# Altium PCB SmartHaloDD.PcbDoc (part 2 of 2)
Units mil, origin at the board's own origin, x right, y up, seen from the top; angles counter-clockwise.
Board outline 2460.63 x 2460.63 mil, 2 copper layers (Top Layer, Bottom Layer), stack 62.8 mil thick; 142 components, 107 nets, 460 pads, 151 vias.
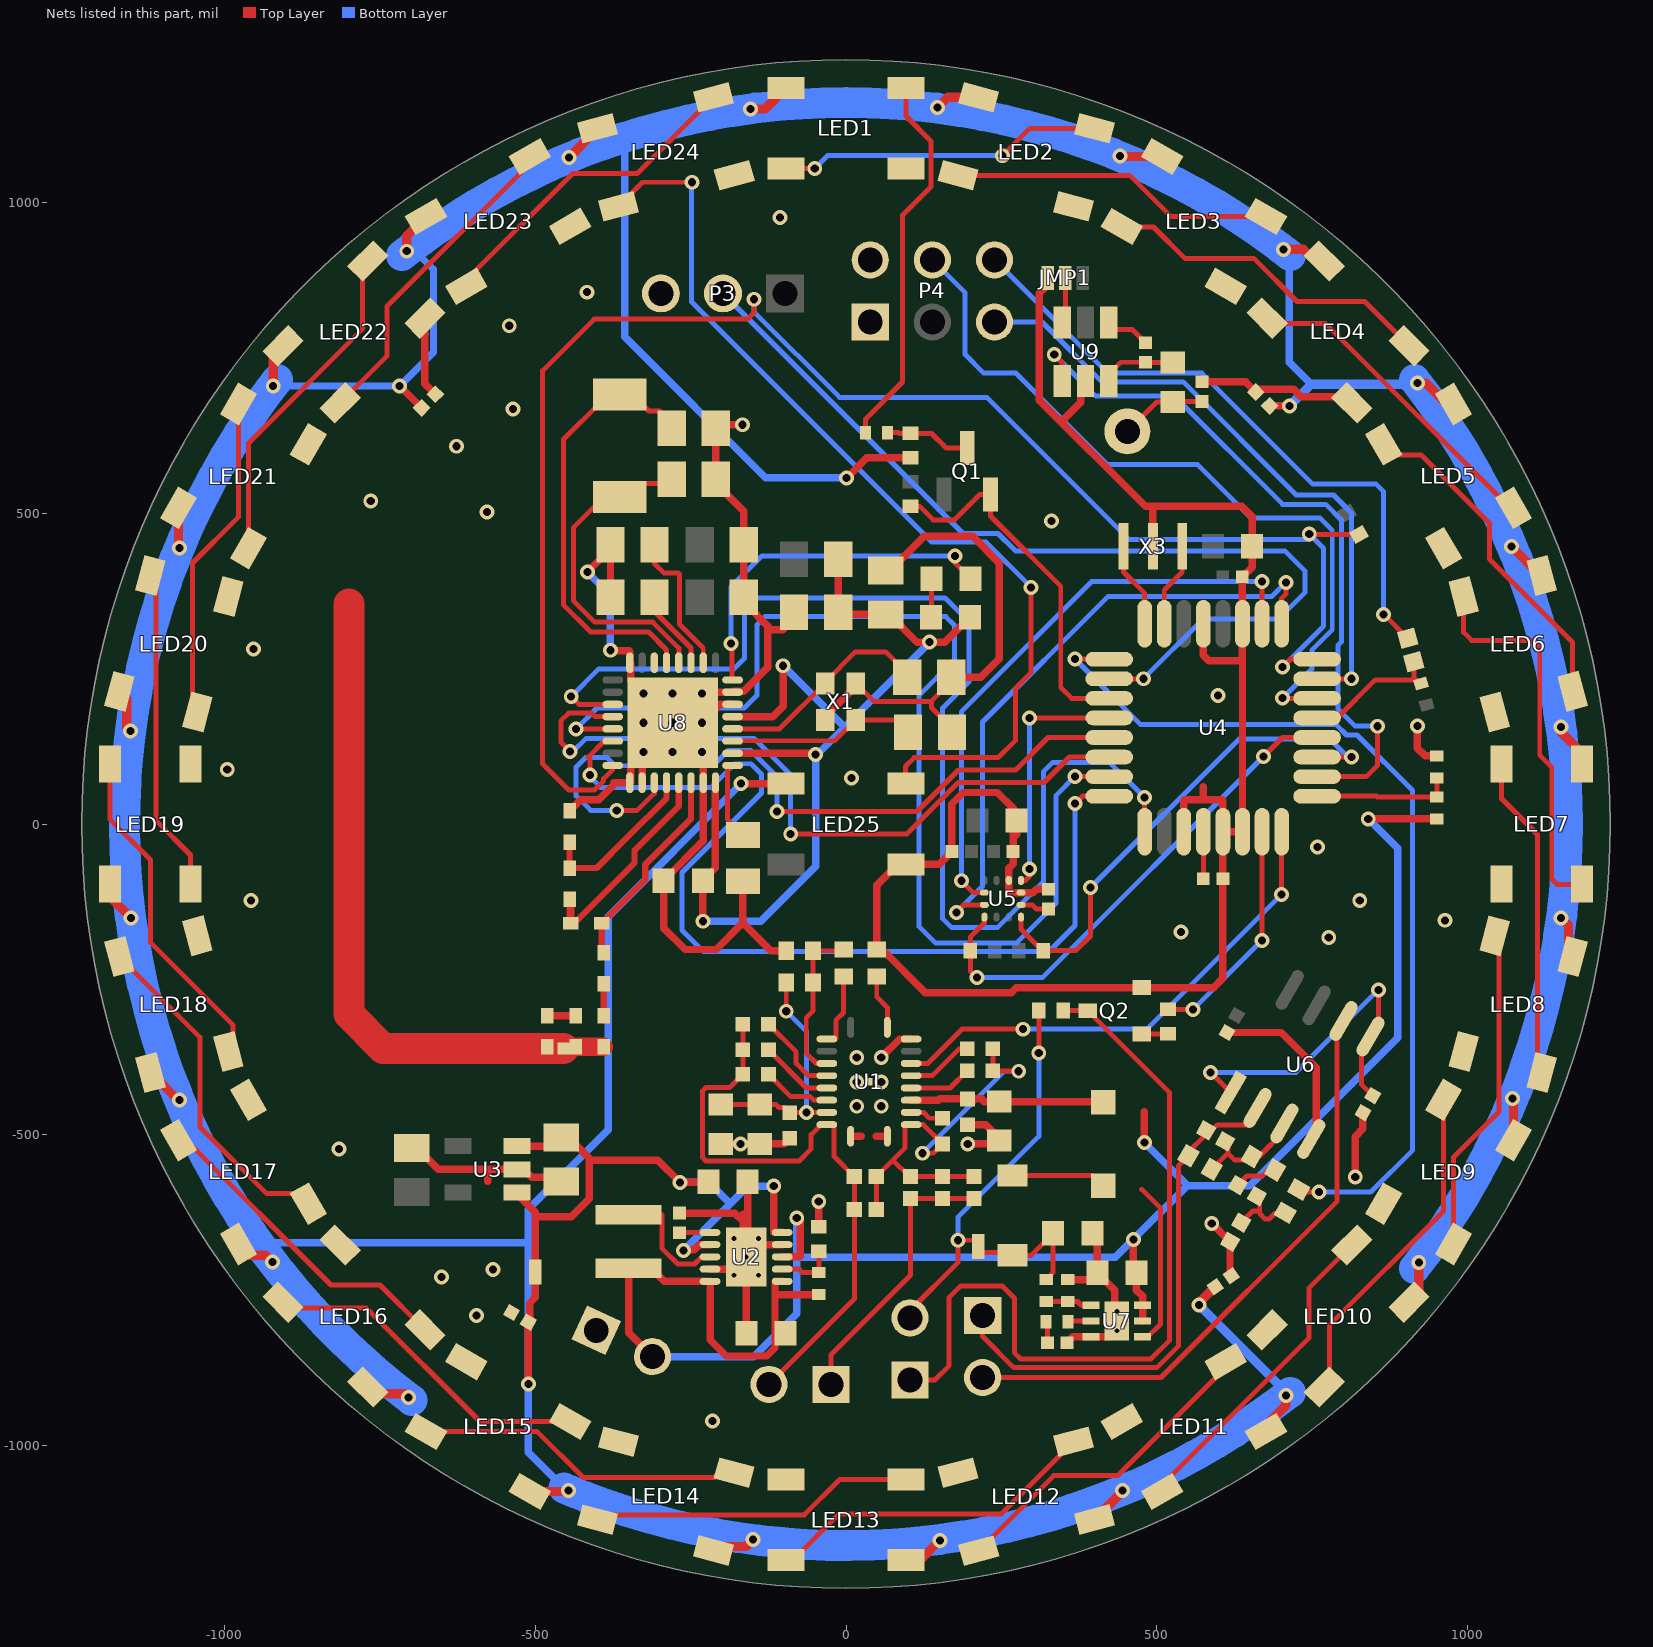
[diagram p2: the nets of this part, all layers, seen from the top]

## Via types
v1: diameter 24, hole 13, Top Layer to Bottom Layer, 107 vias
v2: diameter 24, hole 13, Top Layer to Bottom Layer, tented both sides, 37 vias
v3: diameter 19.68, hole 7.87, Top Layer to Bottom Layer, 7 vias

## Nets (pads, with @x,y where several pads share a name; then routed paths per layer and width w, separated by ;. In a path a pad name is that pad's centre, name@x,y a point inside that pad or via, vN(x,y) a via of type N, cw(c..) or ccw(c..) an arc to the next point about the centre after c; other vN are vias at no path point) (continued)
+5: C16.2 C41.2 NT3.1 U2.2 U2.10 U3.1 U3.3 | length 1047.6
  Top Layer w12: U3.1@-529.76,-593.4 -529.76,-595.24 -500,-625 NT3.1@-500,-711 ; U3.3@-529.76,-518.6 C16.2@-472.03,-518.6 ; -496,-632 -442,-632 -413,-603 -413,-538 C16.2@-446.43,-504.57 ; -410,-541 -303,-541 v1(-267,-577) C41.2@-222.5,-577 ; v1(-261.32,-686.32) -259.99,-684.99 -243.99,-684.99 -236.13,-677.13 U2.2@-218.88,-677.13 ; C41.2@-233.32,-566.32 -221.5,-566.32 C41.2@-221.5,-576 C41.2@-229.49,-568 ; v1(-116.32,-582.82) -116.32,-657.45 U2.10@-102.73,-657.45
  Bottom Layer w12: v1(-267,-577) -220,-577 -186,-611 ; v1(-261.32,-686.32) -186,-611 ; v1(-116.32,-582.82) -157.82,-582.82 -186,-611
AC_N: C12.1 C13.1 C14.1 C35.1 C36.1 P2.2 U1.19 | length 1136.3
  Top Layer w8: P2.2@-124,-902 13.38,-764.62 C35.1@13.38,-620.75 C36.1@13.38,-567.6 -19.1,-535.12 ; C12.1@-166.08,-402.95 -187.2,-424.08 -225.38,-424.08 -231.24,-429.93 -231.24,-536.64 -225.38,-542.5 -75.5,-542.5 -56,-523 -56,-500 -39.9,-483.9 U1.19@-30.91,-483.9 U1.19@-19.1,-483.9 ; C12.1@-166.08,-402.95 C13.1@-166.13,-322.28 C12.1@-166.08,-402.95 ; -19.1,-535.12 U1.19@-19.1,-483.9 ; -19.1,-535.12 U1.19@-19.1,-483.9
AC_P: C4.1 C7.1 C15.1 C32.2 C33.2 C34.2 C35.2 C36.2 U1.2 | length 695.7
  Top Layer w8: C35.2@48.82,-620.75 C36.2@48.82,-567.6 75.42,-541 ; v1(123,-530) 140.4,-530 C7.1@155.45,-514.96 124.39,-483.9 U1.2@104.91,-483.9 95.1,-483.9 95.1,-521.31 75.42,-541 ; C34.2@206.26,-567.14 C32.2@155.08,-567.14 C33.2@103.9,-567.14 101.55,-567.14 75.42,-541 ; C4.1@236.3,-361.92 C15.1@236.3,-397.35 v1@277.35,-397.35
  Bottom Layer w8: v1(123,-530) 255,-398 v1(278,-398)
ANT_N: L2.2 L7.1 U8.21 | length 388.7
  Top Layer w8: L2.2@-445,-121 -441,-117 -441,-159.7 L7.1@-443.2,-159.69
  Top Layer w10: L2.2@-445,-121 -445,-157.9 -435.9,-157.9 -341.21,-63.21 ; -340.21,-62.21 -340.21,-42.21 -269.16,28.84 U8.21@-269.16,66.54
ANT_P: L3.1 L7.2 U8.22 | length 334.3
  Top Layer w10: L3.1@-390.05,-206.94 -393.2,-203.79 L7.2@-393.2,-159.69 -323.21,-89.71 -323.21,-65.21 -249.47,8.53 U8.22@-249.47,66.54
AVDD: C8.1 C10.2 C46.2 FB1.2 L5.2 U8.24 U8.26 U8.29 | length 1634.4
  Top Layer w12: v1(-230.5,-156.5) C8.1@-230.5,-91 -210.1,-70.6 U8.24@-210.1,66.54 ; U8.26@-182.54,113.79 -49.42,113.79 -49.01,113.38 v1(-49.01,112.01) ; U8.29@-182.54,172.84 -117.67,172.84 -101.26,189.26 v1(-101.26,254.68) ; C10.2@-12.57,341 FB1.2@-12.57,426 ; C10.2@-8.9,337.34 C46.2@63.72,337.34 ; C46.2@69.66,337.34 114.32,292.68 v1(134.68,292.68) 159.18,292.68 L5.2@199.5,333
  Bottom Layer w12: v1(-230.5,-156.5) -137.5,-156.5 -49,-68 v1@-49,109 ; v1(-101.26,254.68) -3.07,156.5 ; v1@-47.5,110.5 v1(134.68,292.68)
BAT_SENSE: R10.1 R24.2 U4.25 | length 223.7
  Top Layer w8: U4.25@758.32,44.76 853.68,44.76 854.74,43.71 R10.1@951,43.71 R24.2@951,74.28
BZ_OUT_N: P6.1 Q2.3 R17.1 | length 1281.8
  Top Layer w8: P6.1@103,-895 143,-895 166,-872 166,-762 184,-744 252,-744 271,-763 271,-851 281,-861 491,-861 520.46,-831.54 520.46,-431.77 Q2.3@389.33,-300.64 388.69,-300 R17.1@349.68,-300
BZ_OUT_P: NT2.2 P6.2 R17.2 | length 619.4
  Top Layer w8: P6.2@103,-795 103,-783 180,-706 v1(180,-670) 209,-670 211,-668 NT2.2@213,-670 ; R17.2@307.54,-302.77 R17.2@310.32,-300 v1(310.32,-368.69)
  Bottom Layer w8: v1(180,-670) 180,-633 310.32,-502.69 v1(310.32,-368.69)
CAPIN: C56.2 J1.1 R23.2 | length 140
  Top Layer w8: J1.1@453,632 500.5,679.5 R23.2@526,679.5 526.75,680.25 C56.2@573,680.25
DEC1: C50.2 U8.2 | length 236.4
  Top Layer w8: C50.2@-308.2,449.57 -308.2,419.07 -292.82,403.68 -269.32,403.68 -268.32,402.68 -268.32,321.89 -229.79,283.36 U8.2@-229.79,259.46
DEC2: C51.2 U8.3 | length 129.8
  Top Layer w8: C51.2@-308.2,364.92 -308.2,341.98 -249.47,283.25 U8.3@-249.47,259.46
DRDY: U4.2 U5.11 | length 955.6
  Top Layer w8: v1(185.68,-91.32) 204.9,-110.53 U5.11@222.68,-110.53 ; v1(669.68,390.18) 669.74,390.13 U4.2@669.74,322.32
  Bottom Layer w8: v1(185.68,-91.32) 185.68,180.68 395.18,390.18 v1(669.68,390.18)
DTR: C21.2 P4.6 | length 1032.8
  Top Layer w8: v1(865.48,337.44) C21.2@903.9,299.01
  Bottom Layer w8: P4.6@239,908 421.32,725.68 572.68,725.68 751.32,547.05 853.32,547.05 865.48,534.89 v1(865.48,337.44)
FRONTLED: P3.2 U4.10 | length 1529.2
  Top Layer w8: U4.10@423.68,233.74 v1(478.68,233.74)
  Bottom Layer w8: P3.2@-198,854 188.32,467.68 244.73,467.68 272.73,439.68 706.32,439.68 739,407 739,373 695.68,329.68 574.63,329.68 v1(478.68,233.74)
GND: C1.1 C2.1 C3.1 C5.2 C6.2 C8.2 C9.1 C10.1 C11.2 C16.1 C17.1 C18.1 C19.1 C20.1 C22.1 C24.2 C25.1 C27.1 C28.1 C29.1 C30.1 C31.1 C37.1 C38.1 C39.1 C40.1 C41.1 C42.1 C43.2 C44.1 C45.1 C46.1 C48.2 C49.1 C50.1 C51.1 C52.1 C53.1 C55.1 C56.1 C58.1 C59.1 JMP1.3 LED1.3 LED2.3 LED3.3 LED4.3 LED5.3 LED6.3 LED7.3 LED8.3 LED9.3 LED10.3 LED11.3 LED12.3 LED13.3 LED14.3 LED15.3 LED16.3 LED17.3 LED18.3 LED19.3 LED20.3 LED21.3 LED22.3 LED23.3 LED24.3 LED25.3 P1.1 P3.3 P4.1 P4.2 Q2.2 R2.2 R4.1 R6.1 R19.1 R24.1 R26.2 U1.1 U1.9 U1.20 U1.21 U2.4 U2.9 U2.11 U3.2 U4.3 U4.5 U4.19 U4.21 U4.22 U5.6 U5.8 U6.4 U7.3 U7.7 U8.8 U8.17 U8.18 U8.23 U8.30 U8.31 U8.33 U9.2 X1.2 X1.4 X3.2 | length 8719.7
  Top Layer w8: X1.4@15.61,226.53 44.76,197.38 137.38,197.38 ; C45.1@169.43,229.43 137.38,197.38 ; C2.1@170.43,154.57 137.38,187.62 137.38,197.38
  Top Layer w12: C17.1@-699,-521.57 -690.43,-521.57 -656,-556 -577,-556 ; LED22.3@-678.46,814.29 LED22.3@-677.82,814.29 -677.83,789.18 ; -677.33,788.68 -677.83,789.18 ; C27.1@-660.81,691.92 -677.83,708.94 -677.83,789.18 ; -577,-575 -577,-556 ; U3.2@-529.76,-556 -577,-556 ; U3.2@-518.61,-556 -506,-568.61 -458,-568.61 C16.1@-458,-575.43 ; C48.2@-480.61,-308.51 C6.2@-435.33,-308.51 ; C52.1@-445,21 -427,39 -398.26,39 -374,63.26 -374,66.26 -373.72,66.54 U8.17@-347.9,66.54 -346.73,67.72 -346.73,95.28 -339.13,95.28 -337.72,96.68 -337.72,104.28 U8.33@-328.21,113.79 ; v1(-416.32,405.68) C50.1@-379.07,442.93 ; v1(-379.32,279.68) -378.32,278.68 -348.9,278.68 -347.9,277.68 U8.8@-347.9,259.46 -346.73,258.28 -346.73,230.72 U8.33@-302.69,186.68 ; C51.1@-379.07,364.92 C50.1@-379.07,442.93 ; C50.1@-379.07,449.57 C50.1@-379.07,442.93 ; v2(-326.24,115.76) U8.33@-328.21,113.79 ; v2(-279,115.76) -319.64,115.76 -328.21,107.18 U8.18@-328.21,66.54 U8.33@-328.21,113.79 ; v2(-279,163) v2(-279,210.24) -277.03,212.21 U8.31@-182.54,212.21 -180.76,213.99 -164.3,213.99 -126,252.29 -126,319 ; C42.1@-268,-626.25 -178.75,-626.25 -163.5,-641.5 ; U2.4@-218.88,-716.51 U2.11@-160.81,-716.5 ; C53.1@-209.57,548.57 -164.5,503.5 C58.1@-164.5,358.5 ; C53.1@-209.57,555 -209.57,642.68 v1(-166.32,642.68) ; C40.1@-201.55,-514.78 -99.38,-514.78 C11.2@-90.56,-505.96 ; LED24.3@-191.3,1032.83 LED24.3@-179.89,1044.24 ; U8.30@-182.54,192.53 -202.23,192.53 v2(-231.76,163) -229.79,161.03 U8.23@-229.79,66.54 -229.79,-27.29 C8.2@-293.5,-91 -293.5,-167.51 -259,-202 -209,-202 -166,-159 ; v3(-180.49,-667.29) U2.11@-165.13,-667.29 ; R26.2@-166,-92.4 -166,-159 ; U2.11@-165.13,-692.49 U2.11@-165.13,-667.29 ; -165.13,-628 U2.11@-165.13,-667.29 ; C58.1@-164.5,357.5 -120,313 -102,313 C10.1@-96,319 ; C1.1@-160.3,-819.82 U2.11@-160.3,-697.32 ; -158.5,-649.58 C41.1@-158.5,-576 C41.1@-151,-583.5 ; U2.11@-151,-687.01 -141.12,-677.14 U2.9@-102.73,-677.13 ; U2.11@-145.45,-730.68 v3(-141.12,-726.35) ; R6.1@-96.17,-204 -121,-204 -166,-159 ; C10.1@-83.43,333.43 C10.1@-83.43,341 ; R2.2@-43.81,-648.13 v1(-43.81,-607.82) ; X1.2@-33.61,167.47 -33.61,172.39 X1.4@15.61,221.61 ; U1.20@7.47,-502.6 24.4,-502.6 ; 48.4,-502.6 U1.1@66.53,-502.6 ; v2(56.69,-375.63) 86.22,-346.1 U1.9@104.91,-346.1 ; C46.1@63.72,408.2 71.2,408.2 126,463 204,463 247,420 247,266 217,236 C45.1@169.43,236 ; C5.2@195.45,-483.96 224.95,-483.96 256,-515 v1(196,-515) ; C25.1@274.7,5.62 274.7,-16.57 268.95,-22.32 ; JMP1.3@325,868 311.18,854.18 311.18,682.18 482.09,511.28 637.12,511.28 653.72,494.68 C18.1@653.72,446.99 653.72,413.53 C19.1@637.97,397.78 637.97,263 584,263 575.25,271.75 U4.5@575.25,322.32 ; C24.2@326,-105.25 305.97,-105.25 300.68,-110.53 263.26,-110.53 262.05,-109.32 262.05,-71.32 268.95,-64.41 C44.1@268.95,-44.38 268.95,-22.32 ; 346.18,647.18 378,679 378,705.49 U9.2@385.46,712.95 ; C9.1@355.75,-835 365.16,-825.59 U7.7@426.16,-825.59 ; R19.1@357,-733.28 393.22,-733.28 C37.1@404.5,-722 ; C3.1@396.5,-659 404.5,-667.01 C37.1@404.5,-722 ; U7.7@432.84,-781.09 432.84,-750.34 C37.1@404.5,-722 ; U7.7@436,-821 v3(436,-784.25) ; X3.2@494,447 494,510.28 ; U4.19@543.76,-12.32 543.76,37.68 544.76,38.68 575,38.68 ; C56.1@573,711.75 643.1,711.75 C30.1@659.59,695.26 ; 575,60 575,38.68 ; v1(588.68,-642.89) C55.1@618.14,-672.34 C29.1@618.14,-725.73 ; C22.1@613.13,-335.64 700.64,-335.64 757,-392 757,-498.9 U6.4@748.9,-507 ; U4.3@638.24,322.32 U4.22@638.24,-12.32 U4.21@606.75,-12.32 ; C30.1@666.13,699.47 720.84,699.47 732.31,688 804.16,688 LED4.3@814.29,677.86 ; v1(819.68,-568.32) 819.68,-503.32 832.12,-490.88 C31.1@832.12,-464.64 ; v1(919.68,157.68) 919.68,122.22 932.18,109.72 R24.1@951,109.72 ; 268.95,-22.32 268.95,25.42 243.68,50.68 188.96,50.68 170.46,32.18 C43.2@170.46,-44.38 149.87,-64.96 83.04,-64.96 49.5,-98.5 R4.1@49.5,-202.04 58.03,-202.04 127.32,-271.32 265.68,-271.32 273.76,-263.24 591.76,-263.24 606.75,-248.25 C20.1@606.75,-88 U4.21@606.75,-12.32 ; 575,38.68 605.75,38.68 606.75,37.68 U4.21@606.75,-12.32
  Bottom Layer w12: v1(-416.32,405.68) -379.32,368.68 v1(-379.32,279.68) ; v2(-326.24,163) v2(-231.76,163) ; v2(-279,115.76) v2@-278.93,115.68 ; v2(17.32,-375.63) v2@17.32,-371.95
  other v1: -215,-961 -595,-791 -651,-729 -568,-717 -816,-523 -170,-514.78 17.32,-454.37 777,-183 539,-174 964,-155 -958,-123 827,-123 759,-37 9,74 -996,88 599,207 -954,282 331,488 -578,502 -765,520 -627,608 -536,668 -542,802 -417,856 -106,976
  other v2: 17.32,-454.37 56.69,-454.37 17.32,-415 56.69,-415 -231.76,115.76 -326.24,210.24 -231.76,210.24
  other v3: 436,-815.75 -180.49,-726.35 -160.81,-696.82 -141.12,-667.29
HALO: Q1.2 R13.1 U4.11 | length 597.5
  Top Layer w8: R13.1@104,511.32 118.68,511.32 140.31,489.69 174.69,489.69 215.58,530.58 Q1.2@232.62,530.58 232.62,495.68 345.68,382.62 345.68,219.68 363.12,202.24 U4.11@423.68,202.24
INT_MAG: U4.12 U5.7 | length 399.4
  Top Layer w8: U5.7@281.73,-90.85 288.68,-90.85 295.68,-83.85 v1(295.68,-72.32) ; v1(295.68,170.75) U4.12@423.68,170.75
  Bottom Layer w8: v1(295.68,-72.32) v1(295.68,170.75)
INT_XL: U4.1 U5.12 | length 1020
  Top Layer w8: v1(177.78,-142.32) 189.88,-130.22 U5.12@222.68,-130.22 ; U4.1@701.24,322.32 701.24,363.24 708,370 v1@708,384.37
  Bottom Layer w8: v1(177.78,-142.32) 219.68,-100.41 219.68,164.18 421.5,366 685,366 v1(708,389)
NetANT1_1: ANT1.1 C6.1 C47.1 C48.1 | length 1087.1
  Top Layer w8: -800.16,353.73 -800.16,-306.11 -800.16,-333.47 -772.32,-361.32 -480.61,-361.32 -480.61,-361.23 C48.1@-480.61,-358.51 ; ANT1.1@-454.89,-361.23 -447.32,-361.23 -444.6,-358.51 C6.1@-435.33,-358.51
  Top Layer w30: C6.1@-435.33,-358.51 C47.1@-390.05,-358.51
NetC4_2: C4.2 U1.6 | length 108
  Top Layer w8: U1.6@104.91,-405.16 138.92,-405.16 182.16,-361.92 C4.2@194.96,-361.92
NetC7_2: C7.2 U1.3 | length 54.4
  Top Layer w8: U1.3@104.91,-464.21 124.68,-464.21 134.09,-473.62 C7.2@155.45,-473.62
NetC9_2: C9.2 R20.1 | length 34.8
  Top Layer w8: R20.1@322.28,-801 324.25,-802.97 C9.2@324.25,-835
NetC11_1: C11.1 C39.2 C40.2 R3.2 U1.18 | length 399.3
  Top Layer w8: C40.2@-201.55,-451.79 C39.2@-138.55,-451.79 -112.45,-451.79 -107.93,-456.32 -98.86,-456.32 C11.1@-90.56,-464.62 v1@-63.62,-464.62 ; v1(-96.17,-301.46) R3.2@-96.17,-255.18 ; v1(-63.32,-464.32) v1@-63.62,-464.62 ; U1.18@-30.91,-464.21 -60.91,-464.21 -61.32,-464.62 v1@-63.62,-464.62
  Bottom Layer w8: v1(-96.17,-301.46) -63.32,-334.32 v1(-63.32,-464.32)
NetC12_2: C12.2 U1.17 | length 111
  Top Layer w8: C12.2@-124.74,-402.95 -88.84,-438.84 -57.67,-438.84 -51.99,-444.53 U1.17@-30.91,-444.53
NetC13_2: C13.2 U1.15 | length 139.1
  Top Layer w8: C13.2@-124.8,-322.28 -80.32,-366.76 -80.32,-385.32 -60.47,-405.16 U1.15@-30.91,-405.16
NetC14_2: C14.2 U1.16 | length 119.2
  Top Layer w8: C14.2@-124.8,-363.62 -63.57,-424.84 U1.16@-30.91,-424.84
NetC15_2: C15.2 U1.5 | length 101.4
  Top Layer w8: U1.5@104.91,-424.84 167.47,-424.84 C15.2@194.96,-397.35
NetC20_2: C20.2 U4.20 | length 75.7
  Top Layer w8: C20.2@575.25,-88 U4.20@575.25,-12.32
NetC21_1: C21.1 R25.1 U4.29 | length 226
  Top Layer w8: U4.29@758.32,170.75 790.75,170.75 852,232 919.53,232 R25.1@925.41,226.11 ; C21.1@914.09,260.99 914.09,233.79 R25.1@916.89,231
NetC23_1: C23.1 R15.1 R22.2 U6.3 | length 177.5
  Top Layer w8: R15.1@588.75,-555.83 614.58,-530 ; C23.1@610.34,-510.86 614.58,-515.1 614.58,-530 ; R22.2@647.42,-541 625.58,-541 614.58,-530 ; R22.2@664.83,-535.17 705.6,-494.4 U6.3@705.6,-482 U6.3@705.6,-469.4
NetC24_1: C24.1 U5.5 | length 47
  Top Layer w8: U5.5@281.73,-130.22 299.68,-130.22 306.21,-136.75 C24.1@326,-136.75
NetC31_2: C31.2 U6.1 U6.5 | length 541.2
  Top Layer w8: v1(587,-400) U6.1@619,-432 ; U6.5@844.18,-341.98 830,-356.16 830,-419.49 C31.2@847.87,-437.36 ; U6.5@857,-329.16 v1(857,-267)
  Bottom Layer w8: v1(587,-400) 724,-400 v1(857,-267)
NetC42_2: C42.2 U2.1 | length 49.2
  Top Layer w8: C42.2@-268,-657.75 -244.32,-657.75 -244.02,-657.45 U2.1@-218.88,-657.45
NetC47_2: C47.2 L3.2 | length 51.6
  Top Layer w10: C47.2@-390.05,-308.51 L3.2@-390.05,-256.94
NetC52_2: C52.2 L2.1 U8.20 | length 269.6
  Top Layer w10: C52.2@-445,-29 L2.1@-445,-71 -401.62,-71 -351.24,-20.62 -288.84,41.78 U8.20@-288.84,66.54
NetC54_1: C54.1 C55.2 R16.1 | length 107.4
  Top Layer w8: C55.2@635.86,-641.66 654.51,-623 666,-623 ; C54.1@661.34,-598.86 666,-603.51 666,-623 ; R16.1@698,-627 690,-627 681,-636 675,-636 666,-627 666,-623
NetC54_2: C54.2 R22.1 | length 70.2
  Top Layer w8: C54.2@630.66,-581.14 645.48,-566.32 670.68,-566.32 680.17,-556.83 R22.1@690.75,-556.83
NetC57_1: C57.1 U9.4 | length 79.6
  Top Layer w8: U9.4@422.87,807.44 422.87,795.68 461.07,795.68 C57.1@482,774.75
NetC57_2: C57.2 R23.1 U9.3 | length 122.4
  Top Layer w8: U9.3@422.87,712.95 422.87,723.87 442.25,743.25 C57.2@482,743.25 482.76,742.5 R23.1@526,742.5
NetD1_2: D1.2 L4.2 U7.4 | length 396.8
  Top Layer w8: D1.2@268,-565.63 L4.2@397.7,-565.63 ; 476,-588 506.46,-618.46 506.46,-804.71 485.58,-825.59 U7.4@477.34,-825.59
NetJMP1_2: JMP1.2 U9.6 | length 73.6
  Top Layer w8: U9.6@348.06,807.44 353,812.38 JMP1.2@353,879
NetL1_2: L1.2 U2.3 | length 200.3
  Top Layer w8: L1.2@-350,-628.69 -296.82,-628.69 -296.32,-629.19 -296.32,-682.82 -270.82,-708.32 -243.84,-708.32 -232.35,-696.82 U2.3@-218.88,-696.82
NetL5_1: L5.1 L6.2 | length 61
  Top Layer w8: L5.1@137.5,334 L6.2@137.5,395
NetL6_1: L6.1 U8.32 | length 580.1
  Top Layer w8: v1(-185.32,290.68) -183.32,288.68 -183.32,231.9 U8.32@-182.54,231.9 ; v1(175.68,431.68) 175.68,419.81 L6.1@200.5,395
  Bottom Layer w8: v1(-185.32,290.68) -185.32,381.68 -135.32,431.68 v1(175.68,431.68)
NetLED1_2: LED1.2 LED2.4 | length 523.3
  Top Layer w8: LED1.2@-96.46,1055.04 v1(-50.32,1055.04) ; v1(251.68,1075.68) 295.8,1119.8 LED2.4@399.98,1119.8
  Bottom Layer w8: v1(-50.32,1055.04) -29.67,1075.68 v1(251.68,1075.68)
NetLED1_4: LED1.4 R12.2 | length 615.5
  Top Layer w8: R12.2@31.28,630 31.28,651.67 91,711.39 91,980 136.92,1025.92 136.92,1099.08 96.46,1139.54 LED1.4@96.46,1184.96
NetLED2_2: LED2.2 LED3.4 | length 523.4
  Top Layer w8: LED2.2@180.02,1044.2 456.56,1044.2 522.68,978.07 LED3.4@676.01,978.07
NetLED3_2: LED3.2 LED4.4 | length 554.8
  Top Layer w8: LED3.2@443.99,961.93 444.91,961 495,961 546,910 657,910 726,841 834.89,841 LED4.4@896.89,779 ; LED4.4@896.89,779 LED4.4@906.14,769.75 LED4.4@896.89,779
NetLED4_2: LED4.2 LED5.4 | length 523.1
  Top Layer w8: LED4.2@677.86,814.25 686.11,806 771.68,806 1068.68,508.99 LED5.4@1074.51,508.99
NetLED5_2: LED5.2 LED6.4 | length 548.7
  Top Layer w8: LED5.2@865.49,611.01 882.5,594 925.69,594 1035.68,484.01 1035.68,426.18 1169.73,292.14 LED6.4@1169.73,213.66
NetLED6_2: LED6.2 LED7.4 | length 623.3
  Top Layer w8: LED6.2@994.27,366.34 994.27,308.6 1007.18,295.68 1103.18,295.68 1116.68,282.18 1116.68,110.68 1136.02,91.35 1136.02,-88.65 1144.68,-97.32 1184.96,-97.32 LED7.4@1184.96,-96.45
NetLED7_2: LED7.2 LED8.4 | length 523.1
  Top Layer w8: LED7.2@1055.04,96.45 1055.03,40.96 1113,-17 1113,-393.04 LED8.4@1119.81,-399.85
NetLED8_2: LED8.2 LED9.4 | length 529.2
  Top Layer w8: LED9.4@978.04,-676.01 978.04,-535.96 1051,-463 1051,-186.72 LED8.2@1044.19,-179.9
NetLED9_2: LED9.2 LED10.4 | length 541.7
  Top Layer w8: LED10.4@769.77,-906.11 778,-897.87 778,-807 961.96,-623.04 LED9.2@961.96,-443.99
NetLED10_2: LED10.2 LED11.4 | length 523.1
  Top Layer w8: LED11.4@508.96,-1074.44 508.96,-1063.66 745,-827.62 745,-747.05 LED10.2@814.23,-677.81
NetLED11_2: LED11.2 LED12.4 | length 528.9
  Top Layer w8: LED12.4@213.67,-1169.58 334.25,-1049 437,-1049 611.04,-874.96 LED11.2@611.04,-865.46
NetLED12_2: LED12.2 LED13.4 | length 531.4
  Top Layer w8: LED13.4@-85.98,-1184.98 -12,-1111 249.42,-1111 LED12.2@366.32,-994.1
NetLED13_2: LED13.2 LED14.4 | length 523.1
  Top Layer w8: LED14.4@-399.84,-1119.67 -392.18,-1112 -67,-1112 -10.02,-1055.02 LED13.2@96.45,-1055.02
NetLED14_2: LED14.2 LED15.4 | length 530.1
  Top Layer w8: LED15.4@-676.01,-978 -497,-978 -423,-1052 -212,-1052 -204.01,-1044.01 LED14.2@-179.91,-1044.01
NetLED15_2: LED15.2 LED16.4 | length 560
  Top Layer w8: LED16.4@-906.1,-779 LED16.4@-906.1,-769.69 ; LED16.4@-901.1,-779 -772,-779 -589.11,-961.89 LED15.2@-443.99,-961.89 LED15.2@-456.57,-949.32
NetLED16_2: LED16.2 LED17.4 | length 510.6
  Top Layer w8: LED17.4@-1062.03,-508.97 -829,-742 -750.05,-742 LED16.2@-677.82,-814.23
NetLED17_2: LED17.2 LED18.4 | length 562.8
  Top Layer w8: LED18.4@-1169.55,-213.53 -1040,-343.08 -1040,-487.63 -932.63,-595 -865.45,-595 LED17.2@-865.45,-611.03
NetLED18_2: LED18.2 LED19.4 | length 547.6
  Top Layer w8: LED19.4@-1184.99,96.44 -1184.99,7.68 -1119.32,-57.99 -1119.32,-190.93 -987,-323.24 -987,-359.11 LED18.2@-994.12,-366.23
NetLED19_2: LED19.2 LED20.4 | length 523.2
  Top Layer w8: LED20.4@-1119.63,399.98 -1111,391.35 -1111,6.09 -1055.01,-49.9 LED19.2@-1055.01,-96.44
NetLED20_2: LED20.2 LED21.4 | length 527.1
  Top Layer w8: LED20.2@-1052,187.98 -1052,420 -978.02,493.98 LED21.4@-978.02,676.01 ; LED20.2@-1050,185.98 LED20.2@-1044.04,180.02
NetLED21_2: LED21.2 LED22.4 | length 530
  Top Layer w8: LED21.2@-961.88,443.99 -961.88,613.12 -778,797 LED22.4@-778,897.85
NetLED22_2: LED22.2 LED23.4 | length 523.1
  Top Layer w8: LED22.2@-814.21,677.86 -739,753.07 -739,833 -508.99,1063.01 LED23.4@-508.99,1074.51
NetLED23_2: LED23.2 LED24.4 | length 542.3
  Top Layer w8: LED23.2@-611.01,865.49 -611.01,875.99 -440,1047 -336.26,1047 LED24.4@-213.54,1169.73 -224.95,1166.67 -224.82,1166.67 LED24.4@-224.32,1166.17
NetLED24_2: LED24.2 LED25.4 | length 1543.3
  Top Layer w8: LED24.2@-366.22,994.27 -327.49,1033 v1(-248,1033) ; LED25.4@96.46,64.96 95.68,64.96 95.68,92.68 109.68,106.68 244.68,106.68 273,135 273,219 298,244 v1(298,381)
  Bottom Layer w8: v1(-248,1033) -248.32,1032.68 -248.32,840.32 138.32,453.68 225.32,453.68 v1(298,381)
NetQ1_3: Q1.3 R12.1 R14.1 | length 138.7
  Top Layer w8: R12.1@66.72,630 84.68,630 86,628.68 R14.1@104,628.68 137.68,628.68 160.99,605.38 Q1.3@195.21,605.38
NetQ2_1: Q2.1 R18.2 | length 42.2
  Top Layer w8: Q2.1@475.94,-338.04 496.68,-338.04 497.04,-337.69 R18.2@518,-337.69
NetR1_1: R1.1 R19.2 U7.1 | length 75
  Top Layer w8: R1.1@322,-768.72 R19.2@357,-768.72 372.68,-768.72 378.38,-774.41 U7.1@394.66,-774.41
NetR2_1: R2.1 R21.1 U2.7 | length 95.8
  Top Layer w8: U2.7@-102.73,-716.51 -75.5,-716.5 -69.9,-722.1 R21.1@-43.81,-722.1 R2.1@-43.81,-687.5
NetR3_1: R3.1 R5.2 R6.2 U1.14 | length 259.5
  Top Layer w8: U1.14@-30.91,-385.47 -47.53,-385.47 -64,-369 -64,-312 -52.86,-300.86 R3.1@-52.86,-255.18 R6.2@-52.86,-204 -5.62,-204 R5.2@-3.65,-202.04
NetR4_2: R4.2 U1.10 | length 89.1
  Top Layer w8: R4.2@49.5,-245.34 49.5,-278.29 66.53,-295.32 U1.10@66.53,-327.4
NetR5_1: R5.1 U1.12 | length 120.6
  Top Layer w8: U1.12@-30.91,-346.1 -16.32,-346.1 -16.32,-315.98 -3.65,-303.32 R5.1@-3.65,-245.34
NetR16_2: R16.2 U4.9 | length 1477.9
  Top Layer w8: v1(368.68,265.68) 369.13,265.24 U4.9@423.68,265.24 ; R16.2@728.83,-588.25 732.89,-592.32 v1(761.68,-592.32)
  Bottom Layer w8: v1(368.68,265.68) 474.37,160 789,160 805.61,143.39 822.61,143.39 912,54 912,-525 844.68,-592.32 v1(761.68,-592.32)
NetR18_1: R18.1 U4.23 | length 372.7
  Top Layer w8: R18.1@518,-298.32 v1(558.68,-298.32) ; v1(669.74,-187.26) U4.23@669.74,-12.32
  Bottom Layer w8: v1(558.68,-298.32) v1(669.74,-187.26)
NetR20_2: R20.2 U7.2 | length 37.4
  Top Layer w8: R20.2@357.72,-801 358.72,-800 U7.2@394.66,-800
NetR26_1: R26.1 U8.25 | length 125.6
  Top Layer w8: U8.25@-182.54,94.1 -191.04,85.61 -191.04,7.44 R26.1@-166,-17.6
NetU1_7: U1.7 U4.24 | length 810
  Top Layer w8: U1.7@104.91,-385.47 131.68,-385.47 186.84,-330.32 v1(284.68,-330.32) ; v1(701.24,-113.32) U4.24@701.24,-12.32
  Bottom Layer w8: v1(284.68,-330.32) 484.24,-330.32 v1(701.24,-113.32)
NetU4_13: U4.13 U8.19 | length 1212.9
  Top Layer w8: v1(-369,22) -336,22 -308.53,49.47 U8.19@-308.53,66.54 ; v1(-111,20) 114.2,20 181.2,87 273,87 325.25,139.25 U4.13@423.68,139.25
  Bottom Layer w8: v1(-369,22) -411,22 -434.32,45.32 -434.32,91.68 -419,107 -385,107 -371.76,93.76 -222.64,93.76 -222.4,94 -214,94 -190,118 -153,118 -111,76 v1(-111,20)
NetU4_14: U4.14 U8.12 | length 1205.2
  Top Layer w8: v1(-444,117) -459,132 -459,166 -446.47,178.53 -409.53,178.53 -403.84,172.84 U8.12@-375.46,172.84 U8.12@-387.32,172.84 ; v1(-89,-16) 98,-16 180.68,66.68 318.68,66.68 359.76,107.76 U4.14@423.68,107.76
  Bottom Layer w8: v1(-444,117) -439.36,117 -418.36,138 -148,138 -89,79 v1(-89,-16)
NetU4_15: U4.15 U8.13 | length 1853.4
  Top Layer w8: v1(-434.32,153.16) U8.13@-375.46,153.16 ; v1(368.68,76.68) 369.11,76.26 U4.15@423.68,76.26
  Bottom Layer w8: v1(-434.32,153.16) -400.79,186.68 -163.82,186.68 -143.32,207.18 -143.32,320.68 -130.32,333.68 160.68,333.68 174.68,319.68 174.68,264.18 117.68,207.18 117.68,-165.32 143.68,-191.32 274.68,-191.32 337.68,-128.32 337.68,45.68 v1(368.68,76.68)
NetU4_16: U4.16 U8.14 | length 1613.2
  Top Layer w8: v1(-412,79) -412,104.56 -415,107.56 -389.09,133.47 U8.14@-375.46,133.47 ; v1(368.68,32.68) 380.76,44.76 U4.16@423.68,44.76
  Bottom Layer w8: v1(-412,79) -412,76 -395,59 -217,59 -179,97 -153,97 -136,80 -136,50 -264,-78 -264,-171 -229.69,-205.32 326.68,-205.32 368.68,-163.32 v1(368.68,32.68)
NetU4_17: U4.17 U8.11 | length 1957.1
  Top Layer w8: v1(-442.32,205.18) -429.66,192.53 U8.11@-375.46,192.53 ; U4.17@480.76,-12.32 v1(480.76,42.61)
  Bottom Layer w8: v1(-442.32,205.18) -397.82,249.68 -180.32,249.68 -163.32,266.68 -163.32,344.68 -144.32,363.68 159.68,363.68 197.68,325.68 197.68,228.68 155.68,186.68 155.68,-152.32 169.68,-166.32 244.18,-166.32 317.68,-92.82 317.68,84.18 332.18,98.68 424.68,98.68 v1(480.76,42.61)
NetU8_6: U8.6
OSC_N: U4.8 X3.3 | length 138.8
  Top Layer w8: X3.3@446.76,447 446.76,405.6 480.76,371.59 U4.8@480.76,322.32
OSC_P: U4.7 X3.1 | length 136.7
  Top Layer w8: U4.7@512.26,322.32 512.26,376.62 541.24,405.6 X3.1@541.24,447
QTOUCH: U4.26 U9.1 | length 1169.9
  Top Layer w8: v1(335.18,755.68) 348.06,742.81 U9.1@348.06,712.95 ; U4.26@758.32,76.26 837.26,76.26 855.68,94.68 v1(855.68,157.39)
  Bottom Layer w8: v1(335.18,755.68) 402.22,688.65 528.72,688.65 702.93,514.44 772.04,514.44 797.23,489.25 797.23,292.97 791.68,287.42 791.68,185.39 819.68,157.39 v1(855.68,157.39)
R\D\Y\N\: R11.1 U4.32 U8.16 | length 2663.5
  Top Layer w8: U8.16@-364.32,94.1 U8.16@-375.46,94.1 -375.46,87.43 -390,72.89 -390,69.89 -404.89,55 -446.74,55 -488.32,96.57 -488.32,729.69 -405.32,812.68 -158.32,812.68 -148.32,822.68 v1(-148.32,844.68) ; v1(702.94,252.74) 715.44,265.24 U4.32@758.32,265.24 ; v1(745.68,466.68) 746.42,465.95 R11.1@825.84,465.95
  Bottom Layer w8: v1(-148.32,844.68) -148.32,824.68 -10.32,686.68 226.68,686.68 455.68,457.68 745.68,457.68 v1(745.68,466.68) 768.68,443.68 768.68,318.48 v1(702.94,252.74)
RX: P4.4 U4.30 | length 1241.3
  Top Layer w8: v1(702.68,202.68) 703.12,202.24 U4.30@758.32,202.24
  Bottom Layer w8: P4.4@139,908 191.68,855.32 191.68,755.68 221.58,725.79 273.65,725.79 420.63,578.8 565.6,578.8 651.72,492.68 762.68,492.68 782.68,472.68 782.68,312.68 749.81,279.81 749.81,249.81 v1(702.68,202.68)
RX1: C32.1 C33.1 C34.1 P2.1 | length 454.8
  Top Layer w8: P2.1@-24,-902 -24,-854 103.9,-726.1 C33.1@103.9,-602.57 C32.1@155.08,-602.57 C34.1@206.26,-602.57
SCL: R8.1 U4.28 U5.1 | length 818.7
  Top Layer w8: v1(210.68,-247.32) 200.32,-236.95 R8.1@200.32,-204 200.32,-181.68 222.68,-159.32 U5.1@222.68,-149.9 ; v1(672.12,108.68) 702.68,139.25 U4.28@758.32,139.25
  Bottom Layer w8: v1(210.68,-247.32) 316.12,-247.32 v1(672.12,108.68)
SDA: R9.1 U4.27 U5.4 | length 831.5
  Top Layer w8: U5.4@281.73,-149.9 281.73,-169.32 R9.1@317.69,-205.27 ; R9.1@324.59,-212.17 R9.1@317.69,-205.27 ; v1(393.68,-102.32) 393.68,-180.32 370,-204 R9.1@317.69,-204 R9.1@317.69,-205.27 ; U4.27@758.32,107.76 813.61,107.76 v1(813.68,107.68)
  Bottom Layer w8: v1(393.68,-102.32) 632.68,136.68 778.98,136.68 807.98,107.68 v1(813.68,107.68)
SP_OUT_N: C23.2 P5.1 R15.2 U6.2 | length 854.2
  Top Layer w8: P5.1@220,-791 220,-825 270,-875 500.37,-875 535,-840.37 535,-550.42 R15.2@551.25,-534.17 551.25,-527.75 576.56,-502.44 576.56,-496.24 C23.2@579.66,-493.14 588.86,-493.14 597.81,-484.19 646.81,-484.19 662.3,-468.7 U6.2@662.3,-457
SP_OUT_P: P5.2 U6.6 | length 963.9
  Top Layer w8: P5.2@220,-891 507,-891 790,-608 790,-339.85 U6.6@784,-333.86
TX: P4.5 U4.31 | length 1024.3
  Top Layer w8: U4.31@758.32,233.74 v1(813.68,233.74)
  Bottom Layer w8: P4.5@239,808 315.37,808 411.68,711.68 542.65,711.68 724.65,529.68 784.68,529.68 813.68,500.68 v1(813.68,233.74)
VBAT: C1.2 C5.1 C37.2 C38.2 L1.1 L4.1 P1.2 R10.2 R21.2 U1.4 U2.5 U2.6 U2.8 U7.5 U7.6 | length 3381.4
  Top Layer w12: L1.1@-350,-715.31 -350,-818.63 P1.2@-311.37,-857.26 ; L1.1@-313.69,-715.31 -292.81,-736.19 U2.5@-218.88,-736.19 -218.88,-830.26 -192.82,-856.32 -127.82,-856.32 -114.32,-842.82 C1.2@-114.32,-819.82 ; U2.6@-102.73,-736.19 -114.32,-736.19 -114.32,-757.54 ; U2.8@-102.73,-696.82 -74.32,-696.82 -73.32,-695.82 -73.32,-640.32 v1(-79.32,-634.32) ; C1.2@-97.31,-819.82 C1.2@-114.32,-819.82 ; R21.2@-43.81,-757.54 -114.32,-757.54 ; U1.4@104.91,-444.53 148.68,-444.53 150.6,-442.62 C5.1@195.45,-442.62 218.68,-442.62 222.86,-446.79 C38.2@246.45,-446.79 L4.1@412.72,-446.79 ; L4.1@414,-448.07 L4.1@415.51,-448.07 ; v1(462.47,-668.53) 462.47,-711 467.5,-716.03 C37.2@467.5,-722 467.5,-750.5 477.34,-760.34 U7.6@477.34,-774.41 U7.5@477.34,-800 ; v1(480.44,-513) 480.44,-463.44 ; v1(840.68,8.28) R10.2@951,8.28 ; C1.2@-114.32,-819.82 -114.32,-757.54
  Bottom Layer w12: P1.2@-311.37,-857.26 -148.26,-857.26 -79.32,-788.32 v1(-79.32,-634.32) ; -78,-697.32 433.68,-697.32 v1(462.47,-668.53) 549,-582 650,-582 888,-344 888,-39.03 v1(840.68,8.28) ; v1(480.44,-513) 549.22,-581.78
VBZ: C3.2 D1.1 NT2.1 R1.2 | length 222.5
  Top Layer w8: NT2.1@213,-690 D1.1@263.63,-690 ; D1.1@268,-694.37 298.13,-694.37 C3.2@333.5,-659 333.5,-721.78 R1.2@322,-733.28
  Top Layer w12: D1.1@263.63,-690 261.68,-690 261.68,-694.37 D1.1@268,-694.37
VLED: C27.2 C28.2 C29.2 C30.2 LED1.1 LED2.1 LED3.1 LED4.1 LED5.1 LED6.1 LED7.1 LED8.1 LED9.1 LED10.1 LED11.1 LED12.1 LED13.1 LED14.1 LED15.1 LED16.1 LED17.1 LED18.1 LED19.1 LED20.1 LED21.1 LED22.1 LED23.1 LED24.1 LED25.1 NT3.2 R14.2 | length 12150.2
  Top Layer w12: v1(-718.43,705) C27.2@-683.08,669.65 ; v1(-511.36,-901.32) C28.2@-511.36,-801.88 -509,-799.51 -509,-771 -500,-762 ; -500,-759 NT3.2@-500,-731 ; v1(-169.04,64.96) LED25.1@-96.46,64.96 ; v1(1,557) 33.32,589.32 R14.2@104,589.32 ; C30.2@681.86,672.99 713.38,672.99 v1(713.68,672.68)
  Top Layer w15: LED19.1@-1184.93,-96.48 -1184.93,-117.07 v2(-1151,-151) ; LED20.1@-1169.54,213.63 -1158,202.09 -1158,156 v2(-1152,150) ; LED18.1@-1119.61,-399.86 v2@-1075.48,-444 ; LED21.1@-1074.42,508.91 -1074.42,445.42 v2(-1073,444) ; LED17.1@-959.96,-694 -934,-694 v2(-923,-705) ; v2(-922,705) -922,753.81 LED22.1@-906.1,769.71 ; LED16.1@-769.69,-906.1 -758.78,-917 -710,-917 v2(-704,-923) ; v2(-707,922) -707,947 LED23.1@-676.02,977.98 ; LED15.1@-508.92,-1074.42 -444.42,-1074.42 -445.85,-1073 v2(-447,-1073) ; v2(-446,1073) -399.87,1119.13 LED24.1@-399.87,1119.76 ; LED14.1@-213.48,-1169.52 -206.97,-1163 -161,-1163 v2(-150,-1152) ; v2(-154,1151) -130.42,1151 LED1.1@-96.46,1184.96 ; LED13.1@96.47,-1184.94 119.05,-1184.95 v1(151,-1153) ; v2(147,1153) 163.7,1169.7 LED2.1@213.63,1169.7 ; LED12.1@400,-1119.58 445,-1074.58 v1(445,-1073) ; v2@441.53,1074.47 LED3.1@508.91,1074.47 ; v1(568,-774) 568,-771.13 C29.2@594.1,-745.03 ; LED11.1@676.01,-977.96 676.01,-967.99 708,-936 v2(708,-920) ; v2(704,925) 736,925 747,914 761.84,914 LED4.1@769.71,906.13 ; LED10.1@906.13,-769.65 922,-753.78 v2(922,-706) ; v2(920,710) 933,710 966.98,676.02 LED5.1@977.98,676.02 ; v2(1071,447) 1118.01,399.99 LED6.1@1119.76,399.99 ; LED9.1@1074.48,-508.94 v2@1074.48,-443.48 ; v2(1151,-151) 1163,-163 1163,-206.8 LED8.1@1169.69,-213.5 ; v2(1151,156) 1151,148 1184.96,114.04 LED7.1@1184.96,96.46
  Bottom Layer w12: -938.31,-674 -511.36,-674 ; v2@-921.51,705 v1(-718.43,705) -664,759.43 -664,892.59 v2@-698.96,927.55 ; v2@-453.8,-1069.09 -511.36,-1011.53 v1(-511.36,-901.32) -511.36,-674 ; -356,1109 -356,784 -129,557 v1(1,557) ; v1(-169.04,64.96) -383,-149 -383,-492 -511.36,-620.36 -511.36,-674 ; v2(704,925) 713.68,915.32 713.68,743.32 749,708
  Bottom Layer w15: v1(568,-774) 698.96,-904.96 ; v1(713.68,672.68) 749,708 v2@918.51,708
  Bottom Layer w50: v2@-927.55,698.96 cw(c0,0) -915.21,715.04 ccw(c0,0) v2@-698.96,-927.55 ; -792.08,-849.41 ccw(c0,0) -777.14,-863.1 ccw(c0,0) -761.96,-876.53 ; -682.66,939.61 ccw(c0,0) -698.96,927.55 ccw(c0,0) -715.04,915.21 cw(c0,0) 715.04,915.21 ccw(c0,0) v2@698.96,927.55 ; -632.55,974.05 cw(c0,0) -615.46,984.94 cw(c0,0) -598.17,995.53 ; -435.07,-1076.85 cw(c0,0) -453.8,-1069.09 ccw(c0,0) v2@715.04,-915.21 ; -397.23,-1091.38 ccw(c0,0) -378.12,-1098.14 ccw(c0,0) -358.9,-1104.57 ; v2@-141.54,-1152.76 ccw(c0,0) -121.4,-1155.05 ccw(c0,0) -101.22,-1157 ; v2@915.21,-715.04 ccw(c0,0) v2@915.21,715.04
  other v2: -1073,-444 1073,-442 441,1075
XC_N: C2.2 U8.27 X1.3 | length 289.7
  Top Layer w8: U8.27@-182.54,133.47 -182.01,134.01 -17.86,134.01 X1.3@15.61,167.47 C2.2@93.09,167.47
XC_P: C45.2 U8.28 X1.1 | length 347.8
  Top Layer w8: U8.28@-182.54,153.16 -106.98,153.16 X1.1@-33.61,226.53 -33.61,228.39 15,277 64,277 C45.2@98.57,242.43
XL_N: C59.2 U8.5 X2.2 | length 715.2
  Top Layer w8: U8.5@-288.84,259.46 -288.84,280.19 -317.65,309 -411.1,309 -455,352.9 -455,619 -395,679 -376.58,679 X2.2@-364.1,691.48 -344.48,691.48 -318,665 -300,665 -284.43,649.43 -284.43,641 C59.2@-280.43,637
XL_P: C53.2 U8.4 X2.1 | length 533.5
  Top Layer w8: C53.2@-280.43,555 -287.43,548 -342.23,548 X2.1@-364.1,526.13 -368.1,522.12 -393.88,522.12 -439,477 -439,359.53 -404.47,325 -311.03,325 -269.16,283.13 U8.4@-269.16,259.46
pads on no net: LED25.2 U1.8 U1.11 U1.13 U3.4 U8.7 U8.10 U8.15

## Polygon pours and split planes (outlines as drawn)
GND on Top Layer "Top Layer-GND" (solid, pour order 2): 0,-1230.32 cw(c0,0) -1230.32,0 cw(c0,0) 0,1230.32 cw(c0,0) 1230.32,0 cw(c0,0)
GND on Bottom Layer "Bottom Layer-GND" (solid, pour order 4): 0,-1230.32 cw(c0,0) -1230.32,0 cw(c0,0) 0,1230.32 cw(c0,0) 1230.32,0 cw(c0,0)

## Keep-outs
Mechanical 3:
  circle w39.37: c0,0 r996.06

## Silkscreen, mask and mechanical layers (free items; w line width, h text height)
Outline:
  circle w10: c0,0 r1230.32
Assembly Text Bottom:
  lines w10: -992,-727.36 992,-727.36 992,727.36 -992,727.36 -992,-727.36
Mechanical 23:
  lines w0: -1184.96,97 -1044.06,180 ; -1169.55,-213.52 -1055.04,-96.46 ; -1169.55,214 -1184.96,-96.46 -1119.62,-399.86 ; -1119.62,400 -961.92,444 ; -1074.43,-508.95 -994.12,-366.24 ; -977.98,677 -814.23,678 ; -961.92,-443.99 -1044.06,-179.89 -1055.04,97 -994.12,367 -865.46,612 -443.99,962 ; -906.1,-769.69 -865.46,-611.05 ; -906.1,770 -676.02,978 ; -769.69,907 -611.05,866 ; -677.82,-814.23 -676.02,-977.98 ; -508.95,1075 -366.24,995 ; -443.99,-961.92 -399.86,-1119.62 ; -399.86,1120 -96.46,1185 214,1170 509,1075 770,907 978,677 1120,400 1185,97 1170,-213.52 1075,-508.95 907,-769.69 ; -213.52,-1169.55 97,-1184.96 400,-1119.62 677,-977.98 ; -179.89,-1044.06 -96.46,-1184.96 ; 97,-1055.04 214,-1169.55 ; 97,1185 180,1045 ; 180,-1044.06 444,-961.92 678,-814.23 866,-611.05 995,-366.24 1056,-96.46 1045,180 962,444 815,678 612,866 367,995 ; 367,-994.12 509,-1074.43 ; 400,1120 444,962 ; 612,-865.46 770,-906.1 ; 677,978 678,815 ; 815,-677.82 978,-676.02 ; 866,612 907,770 ; 962,-443.99 1120,-399.86 ; 995,367 1075,509 ; 1045,-179.89 1185,-96.46 ; 1056,97 1170,214